# Allegro board LASTT.brd
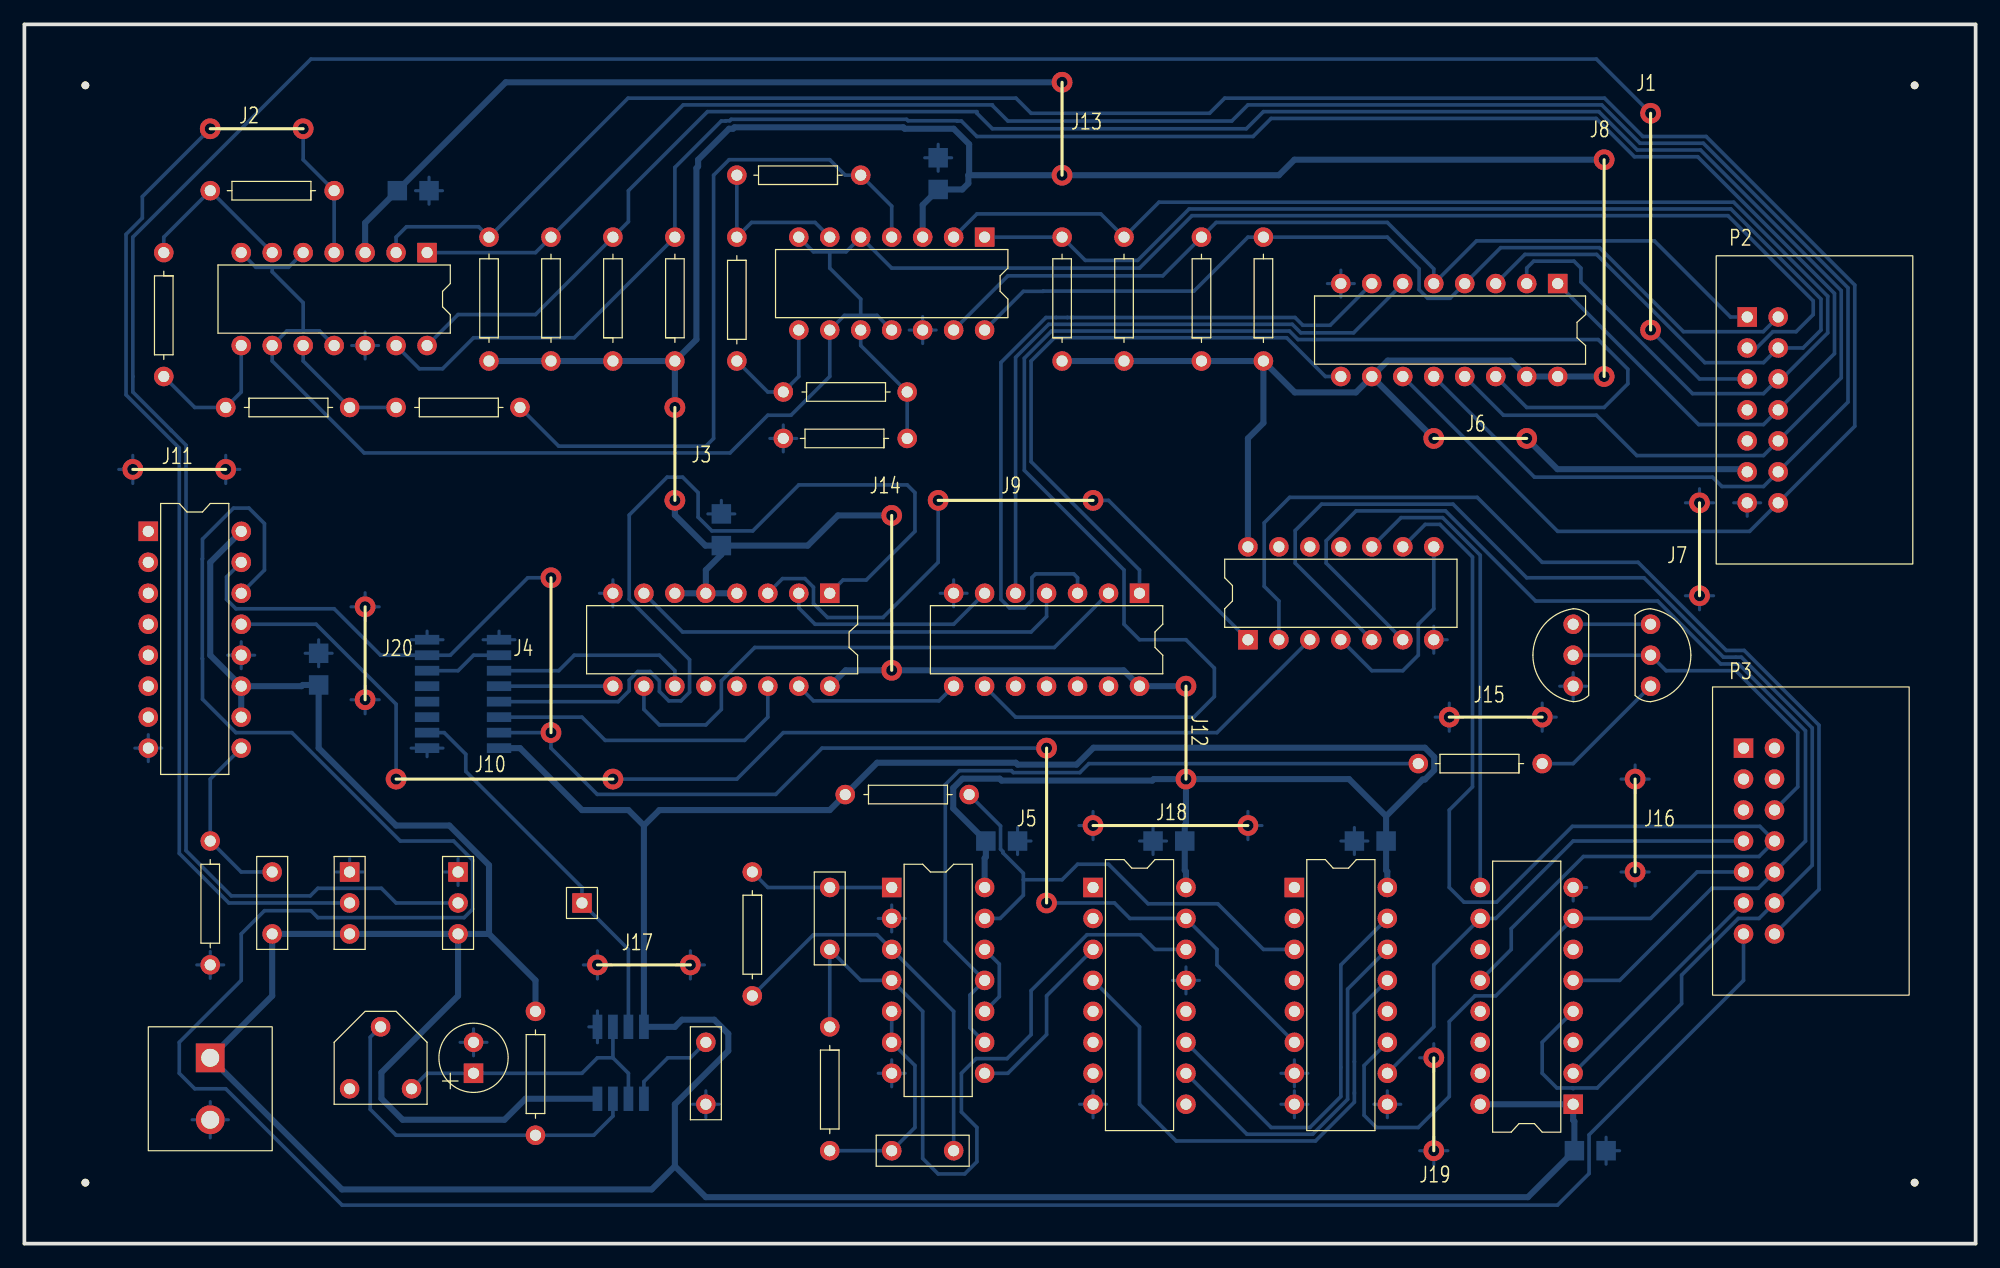
[diagram p0: board, top side]
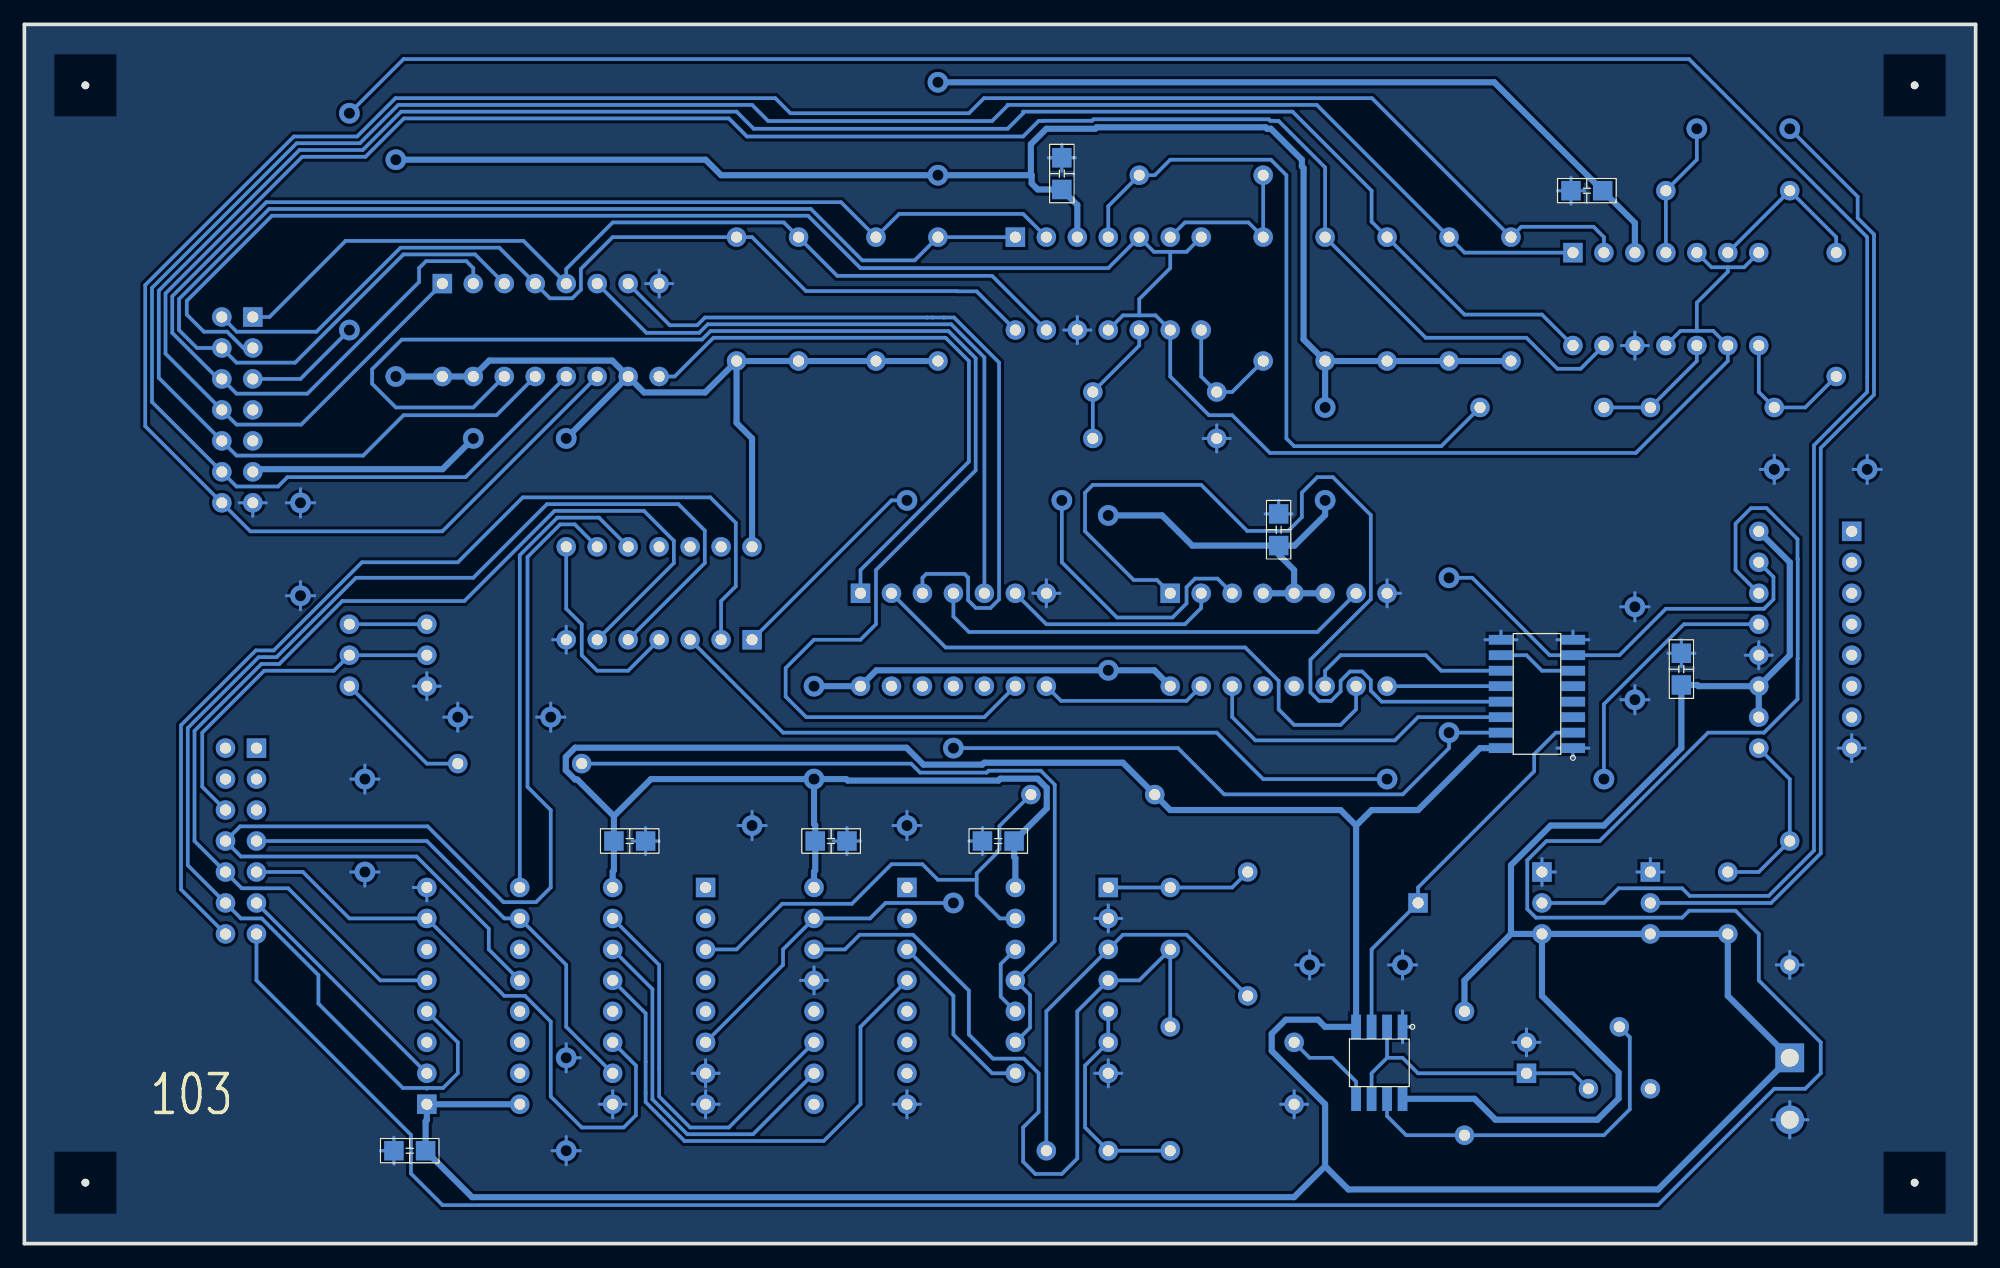
[diagram p1: board, bottom side, seen from below]

Outline 160 x 100 mm; copper layers: TOP, BOTTOM. Coordinates in mm from the lower left corner of the outline.
Outline path: 0,100 0,0 160,0 160,100 0,100

## Design rules (mm)
nets with their own width: min track width 0.5; nets +5V GND

## Placement (name value [footprint] x y rotation side)
C1  10uF  [CAP196]  36.83 13.97 180 top
C2  0.1uF  [CAP300]  55.88 16.51 270 top
C3  0.1uF  [CAP300]  20.32 25.4 90 top
C4  0.1uF  [CAP300]  66.04 29.21 270 top
C5  0.1uF  [CAP300]  76.2 7.62 180 top
C6  0.1uF  [SMDCAP]  30.48 86.36 0 bottom
C7  0.1uF  [SMDCAP]  74.93 86.36 90 bottom
C8  0.1uF  [SMDCAP]  57.15 57.15 90 bottom
C9  0.1uF  [SMDCAP]  24.13 45.72 90 bottom
C10  0.1uF  [SMDCAP]  78.74 33.02 0 bottom
C11  0.1uF  [SMDCAP]  95.25 33.02 180 bottom
C12  0.1uF  [SMDCAP]  111.76 33.02 180 bottom
C13  0.1uF  [SMDCAP]  127 7.62 0 bottom
J1  -  [JUMPER6]  133.35 74.93 270 bottom
J2  -  [JUMPER2]  15.24 91.44 180 bottom
J3  -  [JUMPER2]  53.34 68.58 90 bottom
J4  -  [JUMPER4]  43.18 41.91 270 bottom
J5  -  [JUMPER4]  83.82 27.94 270 bottom
J6  -  [JUMPER2]  123.19 66.04 0 bottom
J7  -  [JUMPER2]  137.36 60.76 90 bottom
J8  -  [JUMPER6]  129.54 71.12 270 bottom
J9  -  [JUMPER4]  74.93 60.96 180 bottom
J10  -  [JUMPER6]  48.26 38.1 0 bottom
J11  -  [JUMPER2]  8.89 63.5 180 bottom
J12  -  [JUMPER2]  95.25 45.72 90 bottom
J13  -  [JUMPER2]  85.09 87.63 270 bottom
J14  -  [JUMPER4]  71.12 47.02 270 bottom
J15  -  [JUMPER2]  124.46 43.18 0 bottom
J16  -  [JUMPER2]  132.08 30.48 270 bottom
J17  -  [JUMPER2]  54.61 22.86 0 bottom
J18  -  [JUMPER4]  87.63 34.29 180 bottom
J19  -  [JUMPER2]  115.57 15.24 90 bottom
J20  -  [JUMPER2]  27.94 44.61 270 bottom
NOREF  -  []  0 0 90 top
NOREF#2  -  [unnamed#2]  155 5 0 top
NOREF#3  -  [unnamed#2]  155 95 0 top
NOREF#4  -  [unnamed#2]  5 95 0 top
NOREF#5  -  []  0 0 0 top
NOREF#6  -  [unnamed#2]  5 5 0 top
P1  CON2  [POWER2]  15.24 15.24 270 top
P2  CON14  [JUMPER14]  141.27 76 270 top
P3  CON14  [JUMPER14]  140.97 40.64 270 top
Q1  2SC1815  [TO92]  133.35 50.8 270 top
Q2  2SC1815  [TO92]  127 45.72 90 top
R1  10K  [RES400]  41.91 19.05 180 top
R2  10K  [RES400]  25.4 86.36 90 top
R3  10K  [RES400]  11.43 81.28 180 top
R4  10K  [RES400]  16.51 68.58 270 top
R5  10K  [RES400]  30.48 68.58 270 top
R6  10K  [RES400]  68.58 87.63 90 top
R7  10K  [RES400]  58.42 82.55 180 top
R8  10K  [RES400]  62.23 69.85 270 top
R9  10K  [RES400]  72.39 66.04 90 top
R10  10K  [RES400]  38.1 72.39 0 top
R11  10K  [RES400]  43.18 72.39 0 top
R12  10K  [RES400]  48.26 72.39 0 top
R13  10K  [RES400]  53.34 72.39 0 top
R14  10K  [RES400]  90.17 72.39 0 top
R15  10K  [RES400]  85.09 72.39 0 top
R16  10K  [RES400]  101.6 72.39 0 top
R17  10K  [RES400]  96.52 72.39 0 top
R18  10K  [RES400]  15.24 33.02 180 top
R19  10K  [RES400]  59.69 30.48 180 top
R20  10K  [RES400]  66.04 17.78 180 top
R21  10K  [RES400]  67.31 36.83 270 top
R22  10K  [RES400]  124.46 39.37 90 top
TP1  TP  [JUMPER1]  45.72 27.94 0 top
U1  NE555  [SOP8]  46.99 17.78 270 bottom
U2  LM339  [DIP14_3]  33.02 81.28 270 top
U3  LM339  [DIP14_3]  78.74 82.55 270 top
U4  40147  [DIP16_3]  125.73 78.74 270 top
U5  4069  [DIP14_3]  91.44 53.34 270 top
U6  4518  [SOP16]  33.02 40.64 0 bottom
U7  4585  [DIP16_3]  66.04 53.34 270 top
U8  4027  [DIP16_3]  10.16 58.42 0 top
U9  4071  [DIP14_3]  100.33 49.53 90 top
U10  4001  [DIP14_3]  71.12 29.21 0 top
U11  4017  [DIP16_3]  87.63 29.21 0 top
U12  4051  [DIP16_3]  104.14 29.21 0 top
U13  4175  [DIP16_3]  127 11.43 180 top
VR1  1M  [RESADJ]  31.75 12.7 270 top
VR2  10K  [JUMPER3]  26.67 30.48 270 top
VR3  10K  [JUMPER3]  35.56 30.48 270 top

## Library data of the parts
C1 = Cap Pol
C2-C5 = Cap NP: Tolerance: ***; User Part Number: ***
C6-C13 = Cap TEXT
J1-J20 = JUMPER
P1 = CON2
P2 P3 = CON14: User Part Number: ***
Q1 Q2 = 2SC1815
R1-R22 = resistor: Tolerance: ***; User Part Number: ***
TP1 = TP: User Part Number: ***
U1 = NE555
U2 U3 = LM339: Tolerance: ***; User Part Number: ***
U4 = 40147: Tolerance: ***; User Part Number: ***
U5 = 4069: Tolerance: ***; User Part Number: ***
U6 = 4518
U7 = 4585: Tolerance: ***; User Part Number: ***
U8 = 4027: Tolerance: ***; User Part Number: ***
U9 = 4071: Tolerance: ***; User Part Number: ***
U10 = 4001: Tolerance: ***; User Part Number: ***
U11 = 4017: Tolerance: ***; User Part Number: ***
U12 = 4051: Tolerance: ***; User Part Number: ***
U13 = 4175: Tolerance: ***; User Part Number: ***
VR1 = VR1: Tolerance: ***; User Part Number: ***
VR2 VR3 = VR2: User Part Number: ***

## Footprints (pads in the part's own frame, mm; a bottom-side part is the same pattern mirrored in y, then rotated)
CAP196
  rect 1.6x1.6 hole 0.914: 1(0,0)
  round 1.6 hole 0.91: 2(0,-2.54)
CAP300
  round 1.6 hole 0.91: 1(0,0) 2(5.08,0)
DIP14_3
  rect 1.6x1.6 hole 0.914: 1(0,0)
  round 1.6 hole 0.91: 2(0,-2.54) 3(0,-5.08) 4(0,-7.62) 5(0,-10.16) 6(0,-12.7) 7(0,-15.24) 8(7.62,-15.24) 9(7.62,-12.7) 10(7.62,-10.16) 11(7.62,-7.62) 12(7.62,-5.08) 13(7.62,-2.54) 14(7.62,0)
DIP16_3
  rect 1.6x1.6 hole 0.914: 1(0,0)
  round 1.6 hole 0.91: 2(0,-2.54) 3(0,-5.08) 4(0,-7.62) 5(0,-10.16) 6(0,-12.7) 7(0,-15.24) 8(0,-17.78) 9(7.62,-17.78) 10(7.62,-15.24) 11(7.62,-12.7) 12(7.62,-10.16) 13(7.62,-7.62) 14(7.62,-5.08) 15(7.62,-2.54) 16(7.62,0)
JUMPER1
  rect 1.6x1.6 hole 0.914: 1(0,0)
JUMPER3
  rect 1.6x1.6 hole 0.914: 1(0,0)
  round 1.6 hole 0.91: 2(2.54,0) 3(5.08,0)
JUMPER14
  rect 1.6x1.6 hole 0.914: 1(0,0)
  round 1.6 hole 0.91: 2(0,2.54) 3(2.54,0) 4(2.54,2.54) 5(5.08,0) 6(5.08,2.54) 7(7.62,0) 8(7.62,2.54) 9(10.16,0) 10(10.16,2.54) 11(12.7,0) 12(12.7,2.54) 13(15.24,0) 14(15.24,2.54)
POWER2
  rect 2.362x2.362 hole 1.473: 1(0,0)
  round 2.362 hole 1.473: 2(5.08,0)
RES400
  round 1.6 hole 0.91: 1(0,0) 2(0,10.16)
RESADJ
  round 1.6 hole 0.91: 1(0,0) 2(-5.08,-2.54) 3(0,-5.08)
SMDCAP
  rect 1.6x1.6 smd: 1(0.1,0) 2(2.7,0)
SOP8
  rect 2x0.8 smd: 1(0,0) 2(0,-1.27) 3(0,-2.54) 4(0,-3.81) 5(5.9,-3.81) 6(5.9,-2.54) 7(5.9,-1.27) 8(5.9,0)
SOP16
  rect 2x0.8 smd: 1(0,0) 2(0,-1.27) 3(0,-2.54) 4(0,-3.81) 5(0,-5.08) 6(0,-6.35) 7(0,-7.62) 8(0,-8.89) 9(5.9,-8.89) 10(5.9,-7.62) 11(5.9,-6.35) 12(5.9,-5.08) 13(5.9,-3.81) 14(5.9,-2.54) 15(5.9,-1.27) 16(5.9,0)
TO92
  round 1.6 hole 0.91: 1(0,0) 2(2.54,0) 3(5.08,0)
unnamed#2
  round 0.635 hole 3.175 unplated: (0,0)

## Nets
+5V: C3.1 C6.1 C7.1 C8.1 C9.1 C10.1 C11.1 C12.1 C13.1 P1.1 P2.11 R1.1 R10.1 R11.1 R12.1 R13.1 R14.1 R15.1 R16.1 R17.1 R21.1 U1.4(RST) U1.8(VCC) U2.3 U3.3 U4.10(I\9\) U4.15(I\0\) U4.16(VCC) U5.14 U6.16 U7.4(A>BIN) U7.5(A<BIN) U7.6(A=BIN) U7.16(VCC) U8.10(J) U8.11(K) U8.16 U9.14 U10.14 U11.16(VCC) U12.16(VCC) U13.1(R\S\T\) U13.16(VCC) VR2.3(A) VR3.3(A)
GND: C1.2 C2.2 C6.2 C7.2 C8.2 C9.2 C10.2 C11.2 C12.2 C13.2 P1.2 P2.13 Q2.1(B) R9.2 R18.2 U1.1(GND) U2.12 U3.12 U4.8(GND) U5.7 U6.1(CLK) U6.8 U6.9(CLK) U7.8(GND) U8.8 U8.12(RST) U9.7 U10.2(I1) U10.7 U11.8(GND) U11.13(C\K\E\N\) U12.7(VEE) U12.8(GND) U12.9(C) U13.8(GND) VR2.1(WIPER) VR3.1(WIPER)
AD0: P2.14 R10.2 U2.2(OUT) U4.11(I\1\)
AD1: P2.12 R11.2 U2.1(OUT) U4.12(I\2\)
AD2: P2.10 R12.2 U2.14(OUT) U4.13(I\3\)
AD3: P2.8 R13.2 U2.13(OUT) U4.1(I\4\)
AD4: P2.6 R14.2 U3.2(OUT) U4.2(I\5\)
AD5: P2.4 R15.2 U3.1(OUT) U4.3(I\6\)
AD6: P2.2 R16.2 U3.14(OUT) U4.4(I\7\)
AD7: P2.1 R17.2 U3.13(OUT) U4.5(I\8\)
CLK: TP1.1 U1.3(OUT) U6.2(EN)
MOTOR-GND: P3.6 Q1.2(C) Q2.2(C)
MR: U6.7(CLR) U6.15(CLR) U8.15(Q) U11.15(RST) U12.6(E\N\)
MR2: P3.13 U8.14(Q\)
SW1: P3.14 U9.2(I1)
SW2: P3.12 U9.5(I0) U13.4(D0)
SW3: P3.10 U9.6(I1) U13.5(D1)
SW4: P3.8 U9.9(I1) U13.12(D2)
SWLED1: P3.11 U13.2(Q0)
SWLED2: P3.9 U12.11(A) U13.7(Q1)
SWLED3: P3.7 U12.10(B) U13.10(Q2)
VR3: P2.5 VR3.2(B)
VR-LED: P2.3 U2.5(+IN) U2.7(+IN) U2.9(+IN) U2.11(+IN) U3.5(+IN) U3.7(+IN) U3.9(+IN) U3.11(+IN)
N01155: R2.2 R3.1 U2.6(-IN)
N01159: R2.1 U2.4(-IN) VR2.2(B)
N01792: R3.2 R4.1 U2.8(-IN)
N01886: R4.2 R5.1 U2.10(-IN)
N01980: R5.2 R6.1 U3.4(-IN)
N02074: R6.2 R7.1 U3.6(-IN)
N02168: R7.2 R8.1 U3.8(-IN)
N02262: R8.2 R9.1 U3.10(-IN)
N03177: U4.9(A\) U5.1(I)
N03181: U4.7(B\) U5.3(I)
N03188: U4.6(C\) U5.5(I)
N03200: U4.14(D\) U5.9(I)
N03212: U5.8(O) U7.15(A3)
N03219: U5.6(O) U7.2(A2)
N03231: U5.4(O) U7.7(A1)
N03243: U5.2(O) U7.10(A0)
N03277: U6.11(Q0) U7.11(B0)
N03279: U6.12(Q1) U7.9(B1)
N03281: U6.13(Q2) U7.1(B2)
N03283: U6.14(Q3) U7.14(B3)
N03321: U6.6(Q3) U6.10(EN)
N03414: U7.3(A=BOUT) U9.1(I0)
N03447: U8.13(CLK) U9.3(O)
N03572: C3.2 R18.1 U8.9(SET)
N03618: R1.2 U1.7(DISC) VR1.2
N03634: C1.1 U1.2(TRIG) U1.6(THR) VR1.1
N03747: C2.1 U1.5(CV)
N08986: C4.1 R19.1 U10.1(I0)
N09024: C4.2 R20.1 U10.4(O) U11.14(CLK)
N09103: C5.1 R19.2 U10.3(O)
N09163: C5.2 R20.2 U10.5(I0) U10.6(I1)
N09363: U11.11(9) U12.15(X2)
N09404: U10.8(I0) U11.3(0)
N09430: U11.4(2) U12.13(X0)
N09442: U11.10(4) U12.14(X1)
N09486: R21.2 U10.13(I1) U12.3(X)
N09508: U10.10(O) U10.12(I0)
N09523: R22.2 U10.9(I1) U10.11(O)
N09608: U9.10(O) U13.9(CLK)
N09612: U9.4(O) U9.8(I0)
N10444: Q1.1(B) Q2.3(E)
N10511: Q1.3(E) R22.1

Pads without a net: P2 7 9; P3 1 2 3 4 5; U5 10 11 12 13; U6 3 4 5; U7 12 13; U8 1 2 3 4 5 6 7; U9 11 12 13; U11 1 2 5 6 7 9 12; U12 1 2 4 5 12; U13 3 6 11 13 14 15; VR1 3

## Via types
v1: diameter 1.7, hole 0.91, TOP to BOTTOM, 40 vias

## Routing (per net, layer and track width the routed paths; a pad name or vN(x,y) marks a point on that pad's centre or on a via; arc(x,y) is an arc through that point)
+5V: length 781.9
  BOTTOM w0.5: U6.16 40.64,40.64 45.72,35.56 49.53,35.56 50.8,34.29 ; U2.3 27.94,83.72 C6.1 39.47,95.25 v1(85.09,95.25) ; U4.10 109.19,69.82 104.17,69.82 R16.1 ; U4.10 111.79,72.42 121.89,72.42 U4.15 U4.16 v1(129.54,71.12) ; U4.10 v1(115.57,66.04) ; v1(71.12,59.72) 66.71,59.72 64.23,57.25 C8.1 ; R16.1 101.6,67.31 100.33,66.04 U9.14 ; R16.1 R17.1 R14.1 R15.1 ; C8.1 55.85,57.25 53.34,59.76 v1(53.34,60.96) ; C8.1 57.15,56.52 55.88,55.24 U7.5 ; U12.16 111.76,30.51 111.66,30.61 C12.1 111.66,35.06 ; 50.8,34.29 52.07,35.56 66.04,35.56 R21.1 69.92,39.44 81.3,39.44 81.45,39.29 86.28,39.29 87.66,40.67 114.84,40.67 115.6,39.91 115.6,38.83 114.84,38.07 114.67,38.07 111.66,35.06 ; 50.8,34.29 U1.4 53.34,17.78 53.92,18.36 56.57,18.36 57.72,17.21 57.72,15.81 53.34,11.43 53.34,6.35 ; U8.11 15.24,48.26 15.24,55.88 U8.16 ; U8.11 22.73,45.72 22.83,45.82 C9.1 24.13,40.64 30.48,34.29 34.85,34.29 38.1,31.04 38.1,25.4 ; U8.11 U8.10 ; U13.16 U13.1 127,10.13 127.1,10.03 C13.1 123.29,3.81 55.88,3.81 53.34,6.35 ; 77.4,87.63 77.47,87.7 77.47,90.17 76.2,91.44 72.19,91.44 72.07,91.56 58.23,91.56 58.11,91.44 57.78,91.44 55.24,88.9 55.24,88.35 55.11,88.21 55.11,74.16 R13.1 ; 77.4,87.63 v1(85.09,87.63) 102.87,87.63 104.14,88.9 v1(129.54,88.9) ; 77.4,87.63 77.4,86.96 76.9,86.46 C7.1 73.66,85.19 U3.3 ; U11.16 95.25,30.51 95.15,30.61 C11.1 95.15,34.32 95.25,34.42 v1(95.25,38.1) ; v1(123.19,66.04) 125.71,63.52 140.72,63.52 140.94,63.3 P2.11 ; v1(53.34,68.58) R13.1 ; R13.1 R12.1 R11.1 R10.1 ; v1(95.25,38.1) 92.61,38.1 92.49,37.98 80.13,37.98 79.98,38.13 76.93,38.13 76.17,37.37 76.17,35.69 C10.1 78.84,31.72 78.74,31.62 U10.14 ; v1(95.25,38.1) 108.62,38.1 111.66,35.06 ; U7.6 U7.5 ; U7.5 U7.4 ; R1.1 41.91,21.59 38.1,25.4 ; 53.34,6.35 51.44,4.45 26.04,4.45 P1.1 20.32,20.32 C3.1 VR2.3 VR3.3 ; 38.1,25.4 VR3.3 ; v1(95.25,45.72) U5.14 90.14,47.02 v1(71.12,47.02) 67.34,47.02 U7.16 ; VR3.3 35.56,20.32 29.28,14.04 29.28,11.9 31.01,10.16 39.37,10.16 41.09,11.88 U1.8
GND: length 221.6
  BOTTOM w0.254: U6.8 33.02,50.24 ; U6.8 34.33,49.53 ; U6.8 31.71,49.53 ; v1(124.46,43.18) 125.62,43.18 ; v1(124.46,43.18) 124.46,42.02 ; v1(124.46,43.18) 123.3,43.18 ; v1(124.46,43.18) 124.46,44.34 ; v1(54.61,22.86) 54.61,24.02 ; v1(54.61,22.86) 54.61,21.7 ; v1(54.61,22.86) 53.45,22.86 ; v1(54.61,22.86) 55.77,22.86 ; 46.28,17.78 U1.1 ; U1.1 46.99,19.09 ; U1.1 46.99,16.47 ; 109.06,31.91 C12.2 ; C12.2 107.95,33.02 ; C12.2 110.17,33.02 ; C12.2 109.06,34.13 ; U11.8 87.63,12.54 ; U11.8 87.63,10.32 ; U11.8 88.74,11.43 ; U11.8 86.52,11.43 ; 73.66,73.82 U3.12 ; U3.12 72.55,74.93 ; U3.12 74.77,74.93 ; U3.12 73.66,76.04 ; C11.2 93.66,33.02 ; C11.2 92.55,31.91 ; C11.2 92.55,34.13 ; C11.2 91.44,33.02 ; C7.2 74.93,90.17 ; C7.2 73.82,89.06 ; C7.2 76.04,89.06 ; C7.2 74.93,87.95 ; 14.13,22.86 R18.2 ; R18.2 16.35,22.86 ; R18.2 15.24,21.75 ; R18.2 15.24,23.97 ; U12.7 104.14,15.08 ; U12.7 103.03,13.97 ; U12.7 104.14,12.86 ; U12.7 105.25,13.97 ; Q2.1 127,46.83 ; Q2.1 128.11,45.72 ; Q2.1 127,44.61 ; Q2.1 125.89,45.72 ; R9.2 63.34,66.04 ; R9.2 61.12,66.04 ; R9.2 62.23,67.15 ; R9.2 62.23,64.93 ; U10.7 71.12,15.08 ; U10.7 70.01,13.97 ; U10.7 72.23,13.97 ; U10.7 71.12,12.86 ; 71.12,25.56 U10.2 ; U10.2 71.12,27.78 ; U10.2 70.01,26.67 ; U10.2 72.23,26.67 ; 15.35,63.5 v1(16.51,63.5) ; v1(16.51,63.5) 16.51,62.34 ; v1(16.51,63.5) 16.51,64.66 ; v1(16.51,63.5) 17.67,63.5 ; 24.13,47.31 C9.2 ; C9.2 25.24,48.42 ; C9.2 24.13,49.53 ; C9.2 23.02,48.42 ; 47.15,53.34 U7.8 ; U7.8 48.26,52.23 ; U7.8 48.26,54.45 ; 35.56,29.37 VR3.1 ; VR3.1 35.56,31.59 ; VR3.1 34.45,30.48 ; 137.36,51.98 v1(137.36,53.14) ; v1(137.36,53.14) 136.2,53.14 ; v1(137.36,53.14) 138.52,53.14 ; v1(137.36,53.14) 137.36,54.3 ; 27.94,51.07 v1(27.94,52.23) ; v1(27.94,52.23) 26.78,52.23 ; v1(27.94,52.23) 27.94,53.39 ; v1(27.94,52.23) 29.1,52.23 ; 132.08,36.94 v1(132.08,38.1) ; v1(132.08,38.1) 132.08,39.26 ; v1(132.08,38.1) 130.92,38.1 ; v1(132.08,38.1) 133.24,38.1 ; 10.16,39.53 U8.8 ; U8.8 11.27,40.64 ; U8.8 9.05,40.64 ; U8.8 10.16,41.75 ; 111.76,10.32 U12.9 ; U12.9 112.87,11.43 ; U12.9 110.65,11.43 ; U12.9 111.76,12.54 ; 81.44,31.91 C10.2 ; C10.2 81.44,34.13 ; C10.2 82.55,33.02 ; 55.88,10.32 C2.2 ; C2.2 55.88,12.54 ; C2.2 54.77,11.43 ; C2.2 56.99,11.43 ; 37.61,49.53 U6.9 ; U6.9 40.23,49.53 ; U6.9 38.92,50.24 ; 87.63,33.13 v1(87.63,34.29) ; v1(87.63,34.29) 86.47,34.29 ; v1(87.63,34.29) 88.79,34.29 ; v1(87.63,34.29) 87.63,35.45 ; 46.99,21.7 v1(46.99,22.86) ; v1(46.99,22.86) 46.99,24.02 ; v1(46.99,22.86) 48.15,22.86 ; v1(46.99,22.86) 45.83,22.86 ; v1(115.57,7.62) 115.57,8.78 ; v1(115.57,7.62) 114.41,7.62 ; v1(115.57,7.62) 115.57,6.46 ; v1(115.57,7.62) 116.73,7.62 ; VR2.1 27.78,30.48 ; VR2.1 26.67,31.59 ; VR2.1 25.56,30.48 ; 129.7,6.51 C13.2 ; C13.2 130.81,7.62 ; C13.2 129.7,8.73 ; v1(27.94,44.61) 29.1,44.61 ; v1(27.94,44.61) 27.94,45.77 ; v1(27.94,44.61) 27.94,43.45 ; v1(27.94,44.61) 26.78,44.61 ; 103.03,11.43 U12.8 ; U12.8 105.25,11.43 ; U12.8 104.14,10.32 ; U12.8 104.14,12.54 ; 115.57,14.08 v1(115.57,15.24) ; v1(115.57,15.24) 114.41,15.24 ; v1(115.57,15.24) 115.57,16.4 ; C8.2 58.26,59.85 ; C8.2 57.15,60.96 ; C8.2 56.04,59.85 ; U11.13 96.36,21.59 ; U11.13 94.14,21.59 ; U11.13 95.25,22.7 ; U11.13 95.25,20.48 ; 132.08,29.32 v1(132.08,30.48) ; v1(132.08,30.48) 133.24,30.48 ; v1(132.08,30.48) 130.92,30.48 ; 13.75,10.16 P1.2 ; P1.2 15.24,11.65 ; P1.2 16.73,10.16 ; P1.2 15.24,8.67 ; 31.71,40.64 U6.1 ; U6.1 34.33,40.64 ; U6.1 33.02,39.93 ; 115.57,48.42 U9.7 ; U9.7 116.68,49.53 ; U9.7 115.57,50.64 ; U4.8 107.95,79.85 ; U4.8 106.84,78.74 ; U4.8 107.95,77.63 ; U4.8 109.06,78.74 ; 141.27,59.65 P2.13 ; P2.13 142.38,60.76 ; P2.13 140.16,60.76 ; v1(8.89,63.5) 10.05,63.5 ; v1(8.89,63.5) 8.89,62.34 ; v1(8.89,63.5) 8.89,64.66 ; v1(8.89,63.5) 7.73,63.5 ; v1(100.33,34.29) 101.49,34.29 ; v1(100.33,34.29) 99.17,34.29 ; v1(100.33,34.29) 100.33,33.13 ; v1(100.33,34.29) 100.33,35.45 ; 128.11,29.21 U13.8 127,28.1 ; v1(137.36,60.76) 137.36,61.92 ; v1(137.36,60.76) 138.52,60.76 ; v1(137.36,60.76) 137.36,59.6 ; v1(137.36,60.76) 136.2,60.76 ; U8.12 17.78,49.37 ; U8.12 17.78,47.15 ; U8.12 16.67,48.26 ; U8.12 18.89,48.26 ; C6.2 34.29,86.36 ; C6.2 32.07,86.36 ; C6.2 33.18,85.25 ; C6.2 33.18,87.47 ; C1.2 37.94,16.51 ; C1.2 36.83,15.4 ; C1.2 35.72,16.51 ; C1.2 36.83,17.62 ; U5.7 76.2,54.45 ; U5.7 76.2,52.23 ; U5.7 77.31,53.34 ; U5.7 75.09,53.34 ; U2.12 27.94,74.77 ; U2.12 27.94,72.55 ; U2.12 26.83,73.66 ; U2.12 29.05,73.66 ; 116.84,42.02 v1(116.84,43.18) ; v1(116.84,43.18) 118,43.18 ; v1(116.84,43.18) 116.84,44.34 ; v1(116.84,43.18) 115.68,43.18
AD0: length 191.2
  BOTTOM w0.3: U2.2 30.48,82.55 31.33,83.4 37.25,83.4 R10.2 49.5,93.95 81.31,93.95 82.55,92.71 97.19,92.71 98.42,93.95 129.57,93.95 132.72,90.81 137.91,90.81 150.09,78.62 150.09,67.04 P2.14 141.47,58.42 125.73,58.42 U4.11
AD1: length 178.8
  BOTTOM w0.3: U4.12 123.83,62.87 138.43,62.87 139.2,62.1 142.61,62.1 P2.12 149.54,69.03 149.54,78.39 137.68,90.25 132.49,90.25 129.34,93.4 100.33,93.4 99.01,92.08 80.64,92.08 79.38,93.34 79.38,93.4 54.03,93.4 R11.2 41.91,81.28 U2.1
AD2: length 176.1
  BOTTOM w0.3: U4.13 121.28,67.94 128.91,67.94 132.22,64.64 142.61,64.64 P2.10 148.98,71.01 148.98,78.16 137.44,89.7 132.25,89.7 129.11,92.84 101.6,92.84 100.2,91.44 79.38,91.44 78.11,92.71 78.11,92.84 56.01,92.84 49.53,86.36 49.53,83.82 R12.2 41.91,76.2 35.56,76.2 U2.14
AD3: length 172.5
  BOTTOM w0.3: U4.1 137.29,67.18 142.61,67.18 P2.8 148.43,73 148.43,77.93 137.22,89.14 132.03,89.14 128.88,92.29 102.23,92.29 100.75,90.81 78.11,90.81 76.83,92.08 76.49,92.08 76.47,92.09 72.46,92.09 72.34,92.21 57.95,92.21 57.84,92.09 57.51,92.09 57.49,92.08 57.15,92.08 53.34,88.27 R13.2 45.09,74.3 36.83,74.3 34.29,71.75 32.38,71.75 U2.13
AD4: length 114.1
  BOTTOM w0.3: U4.2 123.19,80.01 123.76,80.58 127.07,80.58 127.64,80.01 127.64,78.87 136.79,69.72 142.61,69.72 P2.6 144.09,70.92 147.87,74.7 147.87,77.7 140.16,85.42 93.04,85.42 R14.2 88.27,84.45 78.11,84.45 U3.2
AD5: length 109.2
  BOTTOM w0.3: U4.3 123.04,81.13 128.92,81.13 137.8,72.26 142.61,72.26 P2.4 145.85,73.46 147.32,74.93 147.32,77.47 139.93,84.86 95.51,84.86 91.29,80.64 87,80.64 R15.2 U3.1
AD6: length 76.4
  BOTTOM w0.3: U3.14 81.92,78.11 83.53,78.11 83.55,78.12 95.9,78.12 100.33,82.55 R16.2 111.76,82.55 114.37,79.94 114.37,78.24 115.07,77.54 116.91,77.54 U4.4 121.06,81.69 129.15,81.69 136.04,74.8 142.59,74.8 143.28,75.48 143.29,75.48 P2.2
AD7: length 75.5
  BOTTOM w0.3: P2.1 139.9,76 133.66,82.24 119.07,82.24 U4.5 115.57,79.94 111.76,83.75 97.72,83.75 R17.2 93.34,79.38 80.64,79.38 U3.13
CLK: length 31.8
  BOTTOM w0.3: U1.3 49.53,24.13 TP1.1 45.72,29.21 36.2,38.73 36.2,40.14 34.42,41.91 U6.2
MOTOR-GND: length 28.2
  BOTTOM w0.3: Q2.2 Q1.2 134.62,46.99 140.34,46.99 145.41,41.91 145.41,37.47 P3.6
MR: length 109.8
  BOTTOM w0.3: v1(83.82,40.64) 65.41,40.64 61.61,36.85 46.97,36.85 43.18,40.64 v1(43.18,41.91) U6.15 ; v1(43.18,54.61) 41.27,54.61 34.92,48.26 U6.7 29.21,48.26 25.4,52.07 17.35,52.07 16.58,52.84 16.58,54.68 U8.15 ; U12.6 97.79,22.86 97.79,24.13 U11.15 90.66,26.67 89.39,27.94 v1(83.82,27.94)
MR2: length 237.8
  BOTTOM w0.3: U8.14 19.68,55.24 19.68,59.05 18.41,60.33 17.15,60.33 14.61,57.78 14.61,56.17 14.59,56.15 14.59,47.99 14.61,47.97 14.61,44.65 17.35,41.91 21.93,41.91 30.82,33.02 35.19,33.02 36.76,31.45 36.76,27.44 36.06,26.74 24.06,26.74 23.49,27.3 19.69,27.3 17.78,25.4 17.78,21.59 12.7,16.51 12.7,13.97 13.97,12.7 16.51,12.7 26.05,3.16 125.71,3.16 128.3,5.75 128.3,8.92 140.97,21.59 P3.13
SW1: length 82.8
  BOTTOM w0.3: U9.2 102.87,52.71 101.67,53.91 101.67,59.12 103.75,61.2 119.14,61.2 124.46,55.88 132.32,55.88 133.04,55.16 139.55,48.65 141.02,48.65 147.16,42.52 147.16,29.05 P3.14
SW2: length 111.5
  BOTTOM w0.3: U13.4 124.46,16.51 124.46,13.97 125.67,12.77 126.93,12.77 ; 126.93,12.77 127,12.7 ; 126.93,12.77 128.97,12.77 135.89,19.68 135.89,22.02 140.54,26.67 142.24,26.67 P3.12 146.6,31.03 146.6,42.29 140.79,48.1 140.34,48.1 139.32,48.1 132.81,54.61 123.19,54.61 117.15,60.65 106.37,60.65 104.21,58.48 104.21,55.81 U9.5
SW3: length 91.3
  BOTTOM w0.3: U9.6 106.75,55.81 106.75,57.65 109.19,60.1 116.53,60.1 123.92,52.7 133.93,52.7 139.09,47.54 140.56,47.54 146.05,42.06 146.05,33.02 P3.10 142.17,29.14 138.36,29.14 130.81,21.59 U13.5
SW4: length 95.6
  BOTTOM w0.3: U13.12 121.92,24.13 121.92,25.83 127.84,31.75 142.24,31.75 P3.8 142.31,34.22 126.93,34.22 120.72,28.01 118.04,28.01 116.84,29.21 116.84,35.56 118.75,37.47 118.75,56.31 116.07,58.99 114.87,58.99 U9.9
SWLED1: length 19.8
  BOTTOM w0.3: U13.2 P3.11
SWLED2: length 50.6
  BOTTOM w0.3: U12.11 109.86,14.61 109.86,10.53 110.86,9.53 114.3,9.53 116.84,12.06 116.84,18.21 118.95,20.32 120.65,20.32 U13.7 133.35,26.67 137.16,30.48 P3.9
SWLED3: length 40.1
  BOTTOM w0.3: U12.10 115.57,17.78 115.57,22.86 U13.10 120.65,26.67 127,33.02 P3.7
VR3: length 218.7
  BOTTOM w0.3: P2.5 137.36,70.92 v1(133.35,74.93) ; VR3.2 30.48,27.94 29.28,29.14 24.06,29.14 23.44,28.52 16.97,28.52 13.25,32.24 13.25,65.48 12.05,66.69 12.05,66.69 8.89,69.85 8.89,71.12 8.89,71.12 8.89,82.55 23.5,97.16 128.91,97.16 v1(133.35,92.71)
VR-LED: length 184.9
  BOTTOM w0.3: U3.11 69.92,76.13 68.58,76.13 ; 68.58,76.13 68.58,77.47 66.04,80.01 66.04,81.35 ; 68.58,76.13 67.24,76.13 U3.9 66.04,71.12 62.86,67.94 60.96,67.94 57.87,64.85 27.86,64.85 20.32,72.39 U2.9 21.52,74.86 22.86,74.86 ; 22.86,74.86 22.86,77.17 20.32,79.71 20.32,80.08 ; 22.86,74.86 24.2,74.86 U2.11 ; U2.5 21.66,80.08 20.32,80.08 ; 66.04,81.35 67.38,81.35 U3.5 71.12,80.01 91.44,80.01 95.74,84.31 139.7,84.31 146.69,77.32 146.69,76.2 145.28,74.8 143.38,74.8 142.04,73.46 P2.3 ; 66.04,81.35 64.7,81.35 U3.7 ; U2.7 18.98,80.08 20.32,80.08
N01155: length 13.8
  BOTTOM w0.3: U2.6 R2.2 11.43,82.55 R3.1
N01159: length 91
  BOTTOM w0.3: U2.4 R2.1 22.86,88.9 v1(22.86,91.44) ; v1(15.24,91.44) 9.67,85.87 9.67,84.11 8.34,82.78 8.34,69.62 12.7,65.25 12.7,32.01 16.77,27.94 VR2.2
N01792: length 11.7
  BOTTOM w0.3: U2.8 17.78,69.85 R4.1 13.97,68.58 R3.2
N01886: length 10.5
  BOTTOM w0.3: R5.1 R4.2 22.86,72.39 U2.10
N01980: length 58.3
  BOTTOM w0.3: U3.4 71.12,85.09 R6.1 67.31,87.63 66.04,88.9 57.78,88.9 56.52,87.63 56.52,66.04 55.88,65.41 43.81,65.41 R5.2
N02074: length 13.7
  BOTTOM w0.3: R6.2 R7.1 59.62,83.75 64.84,83.75 U3.6
N02168: length 10.5
  BOTTOM w0.3: R7.2 60.96,69.85 R8.1 63.5,71.12 U3.8
N02262: length 10.5
  BOTTOM w0.3: U3.10 68.58,73.66 R8.2 R9.1
N03177: length 50.2
  BOTTOM w0.3: U4.9 106.68,71.12 103.5,74.3 84.46,74.3 82.55,72.39 82.55,64.13 91.44,55.24 U5.1
N03181: length 63.3
  BOTTOM w0.3: U5.3 86.36,54.61 86.04,54.93 82.92,54.93 82.62,54.63 82.62,52.77 81.98,52.14 80.78,52.14 80.08,52.84 80.08,72.27 83.77,75.96 84.6,75.96 84.6,75.96 85.52,75.96 85.52,75.96 85.98,75.96 85.98,75.96 104.19,75.96 104.83,75.32 107.07,75.32 U4.7
N03188: length 54.2
  BOTTOM w0.3: U4.6 108.99,74.7 104.67,74.7 103.97,75.4 84,75.4 81.28,72.69 U5.5
N03200: length 122.6
  BOTTOM w0.3: U4.14 123.19,68.58 129.54,68.58 131.48,70.52 131.48,71.72 129.05,74.15 104.44,74.15 103.73,74.85 84.23,74.85 82,72.62 82,63.42 90.17,55.25 90.17,50.8 91.44,49.53 95.25,49.53 97.58,47.2 97.58,44.87 95.89,43.18 81.28,43.18 U5.9
N03212: length 13.7
  BOTTOM w0.3: U5.8 75,44.52 64.7,44.52 U7.15
N03219: length 18
  BOTTOM w0.3: U7.2 63.5,52.14 64.84,50.8 76.2,50.8 U5.6
N03231: length 36.8
  BOTTOM w0.3: U7.7 53.98,50.16 82.55,50.16 83.82,51.44 U5.4
N03243: length 46.4
  BOTTOM w0.3: U7.10 50.8,43.82 52.07,42.55 55.88,42.55 57.15,43.81 57.15,46.15 59.89,48.9 84.45,48.9 U5.2
N03277: length 16.7
  BOTTOM w0.3: U7.11 53.34,46.99 52.07,48.26 45.09,48.26 43.82,46.99 U6.11
N03279: length 9.3
  BOTTOM w0.3: U6.12 U7.9
N03281: length 77.4
  BOTTOM w0.3: U7.1 67.13,54.43 69.03,54.43 73.03,58.42 73.03,61.59 72.39,62.23 63.5,62.23 59.72,58.45 56.37,58.45 55.24,59.58 55.24,61.59 53.98,62.87 52.7,62.87 49.6,59.76 49.6,52.84 54.54,47.89 54.54,45.22 53.84,44.52 52.84,44.52 52.07,45.29 52.07,46.15 51.3,46.92 50.3,46.92 49.6,46.22 49.6,45.35 48.69,44.45 U6.13
N03283: length 26.2
  BOTTOM w0.3: U7.14 60.96,43.18 59.05,41.27 47.62,41.27 45.72,43.18 U6.14
N03321: length 6.4
  BOTTOM w0.3: U6.6 35.56,46.99 36.83,48.26 U6.10
N03414: length 41
  BOTTOM w0.3: U9.1 88.9,60.96 v1(87.63,60.96) ; v1(74.93,60.96) 74.93,55.88 70.4,51.35 65.85,51.35 64.7,52.5 64.7,53.84 64,54.54 62.16,54.54 U7.3
N03447: length 83.4
  BOTTOM w0.3: U9.3 97.79,41.91 62.23,41.91 58.42,38.1 v1(48.26,38.1) ; U8.13 23.92,50.8 30.48,44.24 v1(30.48,38.1)
N03572: length 14.8
  BOTTOM w0.3: U8.9 15.24,38.1 R18.1 17.78,30.48 C3.2
N03618: length 30
  BOTTOM w0.3: VR1.2 28.36,16.93 28.36,11.01 30.48,8.89 R1.2 46.69,8.89 48.26,10.46 U1.7
N03634: length 24
  BOTTOM w0.3: 48.26,15.24 49.53,13.97 U1.6 ; 48.26,15.24 46.99,15.24 45.72,13.97 C1.1 33.02,13.97 VR1.1 ; 48.26,15.24 U1.2
N03747: length 7.8
  BOTTOM w0.3: C2.1 54.61,15.24 52.76,15.24 50.8,13.28 U1.5
N08986: length 12
  BOTTOM w0.3: R19.1 60.96,29.21 C4.1 U10.1
N09024: length 67
  BOTTOM w0.3: R20.1 C4.2 68.58,21.59 U10.4 73.66,19.05 73.66,6.99 74.93,5.71 77.1,5.71 78.11,6.72 78.11,9.53 76.83,10.8 76.83,13.97 78.04,15.17 80.58,15.17 82.55,17.14 82.55,20.75 87.13,25.33 91.51,25.33 92.71,24.13 U11.14
N09103: length 32.6
  BOTTOM w0.3: R19.2 64.7,25.33 69.92,25.33 U10.3 76.2,19.05 C5.1
N09163: length 18.1
  BOTTOM w0.3: R20.2 C5.2 73.03,9.53 73.03,14.61 U10.6 U10.5
N09363: length 32.8
  BOTTOM w0.3: U12.15 107.95,22.86 107.95,14.46 107.95,12.06 105.41,9.53 102.23,9.53 U11.11
N09404: length 15
  BOTTOM w0.3: U10.8 80.64,13.97 83.82,17.15 83.82,20.32 U11.3
N09430: length 43
  BOTTOM w0.3: U11.4 91.44,17.78 91.44,11.43 94.45,8.42 105.87,8.42 109.06,11.61 109.06,12.29 109.06,12.4 109.06,14.92 109.06,14.92 109.06,18.89 U12.13
N09442: length 30.2
  BOTTOM w0.3: U11.10 100.25,8.97 105.64,8.97 108.5,11.84 108.5,20.87 U12.14
N09486: length 39.7
  BOTTOM w0.3: U10.13 80.01,26.67 81.92,28.57 81.92,29.84 ; 81.92,29.84 85.09,29.84 86.36,31.11 88.9,31.11 92.14,27.87 97.86,27.87 101.6,24.13 U12.3 ; 81.92,29.84 81.92,30.37 80.24,32.05 80.24,32.16 80.04,32.35 80.04,34.26 R21.2
N09508: length 6.1
  BOTTOM w0.3: U10.12 79.94,22.93 79.94,20.25 U10.10
N09523: length 63.1
  BOTTOM w0.3: U10.9 77.54,17.71 77.54,20.39 U10.11 75.51,24.82 75.51,37.64 76.66,38.79 80.94,38.79 81.09,38.63 86.55,38.63 87.28,39.37 R22.2
N09608: length 38.4
  BOTTOM w0.3: U9.10 112.88,59.54 116.3,59.54 119.38,56.46 U13.9
N09612: length 17.3
  BOTTOM w0.3: U9.4 110.49,46.99 113.03,46.99 114.3,48.26 114.3,50.8 115.57,52.07 U9.8
N10444: length 6.3
  BOTTOM w0.3: Q2.3 Q1.1
N10511: length 11.5
  BOTTOM w0.3: Q1.3 127,39.37 R22.1

## Copper pours and planes (outline as drawn; the poured copper is in the pictures)
GND on BOTTOM: 0,0 0,100 160,100 160,0 ; 74 cut-outs

## Text on the board
Ref Des/Silkscreen Bottom: 103
PLACE_BOUND_TOP: FIGURE | SIZE | 0.91 | 0.914 | 1.473 | 3.175 | DRILL CHART: TOP to BOTTOM | ALL UNITS ARE IN MILLIMETERS | PLATED | NON-PLATED | QTY | 287 | 17 | 1 | 4
